# Allegro board ZSTABILIZATOR_FINAL.brd
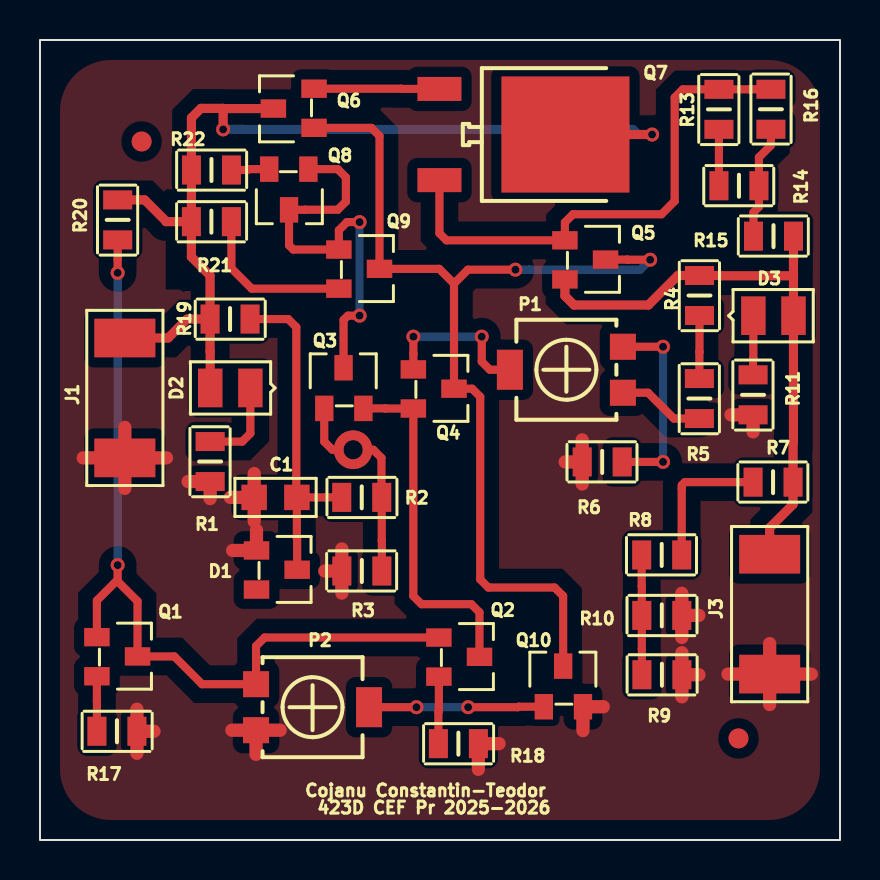
[diagram p0: board, top side]
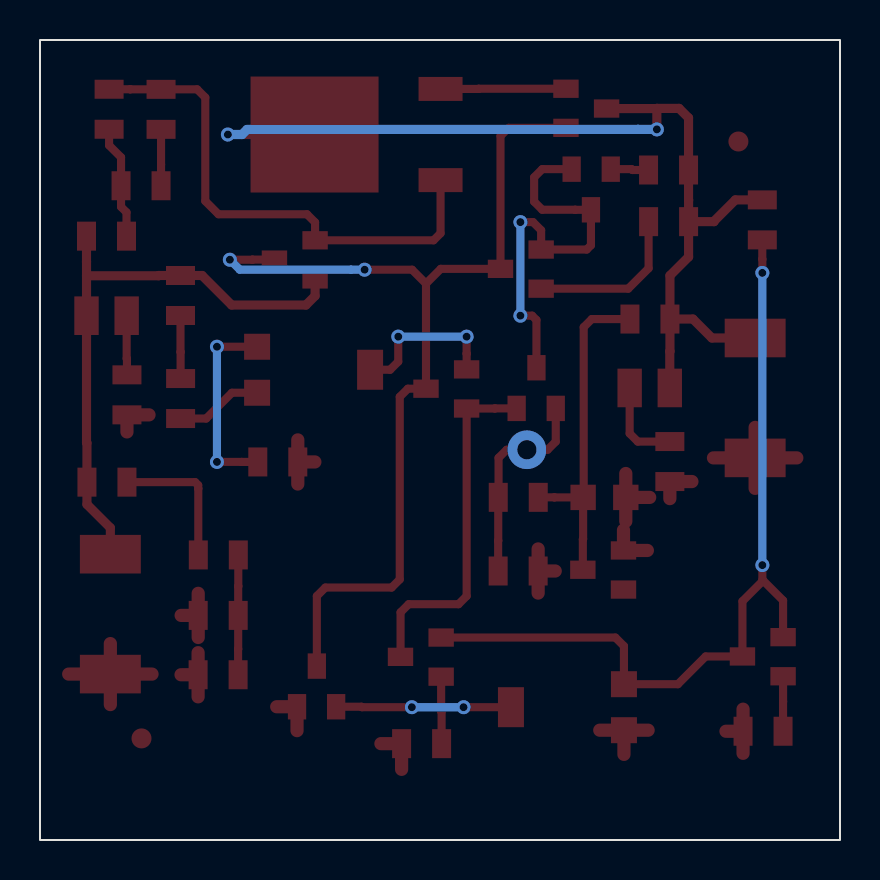
[diagram p1: board, bottom side, seen from below]

Outline 40 x 40 mm; copper layers: TOP, BOTTOM. Coordinates in mm from the lower left corner of the outline.
Outline path: rectangle 0,0 40,40

## Design rules (mm)
nets with their own width: min track width 0.406; nets INM N249921 N249925 N250037 N250043 N250049 N250055 N250075 N250097 N250103 N250201 N250239 N250253 N250273 N250315 N250351 N250357 N250363 N250369 N250387 N252593 N2510651 VREF
nets with their own width: min track width 0.457; nets ALIMENTARE VO
nets with their own width: min track width 0.66; nets GND

## Placement (name value [footprint] x y rotation side)
C1  10n  [SMC0805]  10.71 17.13 0 top
D1  BZX84-C2V7  [TO236]  10.95 14.48 180 top
D2  5V,LED,LED  [SMD0805]  10.52 22.6 180 top
D3  5V,LED,LED  [SMD0805]  35.67 26.21 0 top
J1  CON2  [SMR2512]  4.24 25.1 270 top
J3  CON2  [SMR2512]  36.48 14.29 270 top
NOREF  -  [unnamed]  5.08 34.92 0 top
NOREF#2  -  [#2]  40 0 90 top
NOREF#3  -  [#2]  0 40 0 top
NOREF#4  -  [unnamed]  34.92 5.08 0 top
P1  5k  [TS53YL]  29.14 24.66 0 top
P2  5k  [TS53YL]  10.8 5.49 180 top
Q1  QBC846B  [TO236]  2.97 10.14 180 top
Q2  QBC846B  [TO236]  20.07 10.12 180 top
Q3  QBC846B  [TO236]  14.21 21.71 270 top
Q4  QBC846B  [TO236]  18.8 23.53 180 top
Q5  QBC846B  [TO236]  26.37 29.98 180 top
Q6  QBC846B  [TO236]  13.57 35.61 0 top
Q7  QMJD31C  [TO-252-3]  19.97 37.55 270 top
Q8  QBC856B  [TO236]  13.42 33.41 90 top
Q9  QBC856B  [TO236]  15.07 29.52 180 top
Q10  QBC846B  [TO236]  25.19 6.79 270 top
R1  1k  [RES2012X50N_0805]  8.51 18.92 90 top
R2  3.3k  [RES2012X50N_0805]  16.09 17.13 180 top
R3  3.3k  [RES2012X50N_0805]  16.09 13.45 0 top
R4  5.6k  [RES2012X50N_0805]  32.98 27.23 90 top
R5  680  [RES2012X50N_0805]  32.97 22.07 90 top
R6  3.9k  [RES2012X50N_0805]  28.11 18.9 0 top
R7  100  [RES2012X50N_0805]  36.65 17.89 0 top
R8  100  [RES2012X50N_0805]  31.09 14.25 0 top
R9  100  [RES2012X50N_0805]  31.09 8.26 180 top
R10  100  [RES2012X50N_0805]  31.09 11.23 180 top
R11  220  [RES2012X50N_0805]  35.65 22.26 90 top
R13  1  [RES2012X50N_0805]  33.95 36.53 90 top
R14  1  [RES2012X50N_0805]  34.95 32.71 0 top
R15  1  [RES2012X50N_0805]  36.67 30.19 0 top
R16  1  [RES2012X50N_0805]  36.55 36.54 270 top
R17  220  [RES2012X50N_0805]  3.85 5.44 180 top
R18  220  [RES2012X50N_0805]  20.92 4.82 180 top
R19  1k  [RES2012X50N_0805]  9.5 26.05 180 top
R20  5.6k  [RES2012X50N_0805]  3.88 31 90 top
R21  100  [RES2012X50N_0805]  8.57 30.92 180 top
R22  100  [RES2012X50N_0805]  8.57 33.5 180 top

## Library data of the parts
C1 = C
D1 = BZX84-C2V7_8
D2 D3 = LED_5
J1 = CON2
J3 = CON2_0
P1 P2 = POT
Q1-Q6 Q10 = QBC846B_1
Q7 = QMJD31C_2
Q8 Q9 = QBC856B_2
R1 = R_1
R2-R11 R13-R22 = R_0

## Footprints (pads in the part's own frame, mm; a bottom-side part is the same pattern mirrored in y, then rotated)
RES2012X50N_0805
  rect 0.95x1.45 smd: 1(-1,0) 2(1,0)
SMC0805
  rect 1.27x1.27 smd: 1(0,0) 2(2.134,0)
SMD0805
  rect 1.219x1.93 smd: A(2.007,0) C(0,0)
SMR2512
  rect 1.93x3.048 smd: 1(0,0) 2(5.994,0)
TO236
  rect 1.27x0.914 smd: 1(0.127,0) 2(0.127,1.956) 3(-1.905,0.965)
TO-252-3
  rect 1.2x2.2 smd: 1(0,0) 3(4.56,0)
  rect 5.8x6.4 smd: 2(2.28,6.3)
TS53YL
  rect 1.3x1.3 smd: 1(0,0) 3(0,-2.3)
  rect 1.3x2 smd: 2(-5.65,-1.15)
unnamed
  round 1 smd: (0,0)

## Nets
GND: C1.1 D1.1 J1.2 J3.2 P2.1 Q10.2(E) R1.1 R3.1 R6.1 R9.1 R10.1 R11.1 R17.1 R18.1
ALIMENTARE: D2.A J1.1 Q6.3 Q7.2 R19.2 R20.2 R21.2 R22.2
INM: P1.2(T) Q4.1
VO: D3.A J3.1 Q5.2(E) R4.2 R7.2 R15.2
VREF: Q3.1 R2.1 R3.2
N249921: Q5.1 Q7.3(E) R13.2 R16.1
N249925: R14.2 R15.1 R16.2
N250037: Q6.2(E) Q7.1
N250043: Q8.2(E) R22.1
N250049: Q9.2(E) R21.1
N250055: C1.2 D1.3 R2.2 R19.1
N250075: Q3.3 Q8.1 Q8.3 Q9.1
N250097: Q4.3 Q5.3 Q6.1 Q9.3 Q10.3
N250103: D2.C(2) R1.2
N250201: R7.1 R8.2
N250239: P2.3 Q1.1 Q1.3 Q2.1 R20.1
N250253: Q2.3 Q3.2(E) Q4.2(E)
N250273: R8.1 R9.2 R10.2
N250315: R4.1 R5.2
N250351: P1.3 R5.1
N250357: Q1.2(E) R17.2
N250363: Q2.2(E) R18.2
N250369: P2.2(T) Q10.1
N250387: P1.1 R6.2
N252593: D3.C(2) R11.2
N2510651: R13.1 R14.1

Pads without a net: D1 2

## Via types
v1: diameter 0.7, hole 0.4, TOP to BOTTOM, 14 vias
v2: diameter 1.93, hole 0.965, TOP to BOTTOM, 1 via

## Routing (per net, layer and track width the routed paths; a pad name or vN(x,y) marks a point on that pad's centre or on a via; arc(x,y) is an arc through that point)
GND: length 47.6
  TOP w0.66: R10.1 32.94,11.23 ; R10.1 32.09,10.13 ; R10.1 32.09,12.33 ; J3.2 36.48,9.82 ; J3.2 38.57,8.3 ; J3.2 34.4,8.3 ; J3.2 36.48,6.77 ; R9.1 32.95,8.26 ; R9.1 32.09,7.16 ; R9.1 32.09,9.37 ; R17.1 4.85,6.54 ; R17.1 4.85,4.33 ; R17.1 5.7,5.44 ; 15.09,12.35 R3.1 ; R3.1 15.09,14.55 ; R3.1 14.24,13.45 ; 2.16,19.11 J1.2 ; J1.2 6.33,19.11 ; J1.2 4.24,20.63 ; J1.2 4.24,17.58 ; 26.26,18.9 R6.1 ; R6.1 27.11,17.8 ; R6.1 27.11,20.01 ; 9.52,17.13 C1.1 ; C1.1 10.71,15.94 ; C1.1 10.71,18.32 ; 9.63,14.48 D1.1 10.83,15.49 ; 21.92,3.53 R18.1 22.95,4.82 ; 28.16,6.66 Q10.2 27.15,5.47 ; 9.59,5.49 P2.1 ; P2.1 10.8,4.28 ; P2.1 12.01,5.49 ; 7.4,17.92 R1.1 8.51,17.07 ; 35.65,20.4 R11.1 34.55,21.26
ALIMENTARE: length 53.9
  TOP w0.457: R19.2 8.5,24.43 8.51,24.43 D2.A ; R19.2 7.35,26.05 6.41,25.1 J1.1 ; R19.2 8.5,28.22 7.57,29.15 R21.2 ; 9.16,36.58 v1(9.16,35.53) ; 9.16,36.58 9.16,36.57 Q6.3 ; 9.16,36.58 8.05,36.58 7.57,36.11 R22.2 7.57,32 7.57,32 R21.2 ; R21.2 6.3,30.92 6.3,30.94 5.23,32.01 3.88,32.01 ; Q7.2 v1(30.61,35.27)
  BOTTOM w0.457: v1(9.16,35.53) 10.12,35.53 10.12,35.53 29.65,35.53 29.9,35.27 v1(30.61,35.27)
INM: length 7.9
  TOP w0.406: 23.5,23.51 22.49,23.51 22.09,23.92 v1(22.09,25.17) ; Q4.1 18.67,24.32 18.67,24.32 v1(18.67,25.17)
  BOTTOM w0.406: v1(22.09,25.17) v1(18.67,25.17)
VO: length 29.5
  TOP w0.457: J3.1 36.48,15.61 37.65,16.78 R7.2 37.65,19.85 37.67,19.87 D3.A 37.67,28.21 ; 37.67,28.21 34.07,28.21 34.06,28.23 R4.2 31.89,28.23 30.42,26.75 26.7,26.75 26.25,27.2 Q5.2 ; 37.67,28.21 37.67,28.91 37.67,28.91 R15.2
VREF: length 10.5
  TOP w0.406: R3.2 17.09,14.96 17.09,14.97 R2.1 17.07,17.15 17.07,19.11 16.67,19.51 v2(15.66,19.51) 14.62,19.51 14.21,19.92 Q3.1
N249921: length 26.1
  TOP w0.406: Q7.3 19.97,30.34 20.32,29.98 Q5.1 26.25,30.88 26.65,31.29 31.08,31.29 31.73,31.95 31.73,37.13 32.14,37.53 R13.2 35.48,37.53 35.49,37.54 R16.1
N249925: length 5.7
  TOP w0.406: R15.1 35.67,31.38 35.95,31.66 R14.2 35.95,34.13 36.55,34.73 R16.2
N250037: length 6.3
  TOP w0.406: Q6.2 18.06,37.56 18.07,37.55 Q7.1
N250043: length 1.9
  TOP w0.406: R22.1 10.38,33.5 10.42,33.54 Q8.2
N250049: length 8.1
  TOP w0.406: Q9.2 10.59,27.57 9.57,28.58 R21.1
N250055: length 16.9
  TOP w0.406: C1.2 14.28,17.13 14.28,17.13 R2.2 ; C1.2 12.81,17.16 12.81,25.64 12.41,26.05 R19.1 ; C1.2 12.84,15.05 12.86,15.04 D1.3
N250075: length 20.8
  TOP w0.406: v1(15.98,30.89) 15.35,30.89 14.94,30.49 Q9.1 12.66,29.52 12.45,29.73 Q8.3 13.24,31.51 13.24,31.51 14.89,31.51 15.29,31.92 15.29,33.14 14.89,33.54 Q8.1 ; v1(15.98,26.22) 15.39,26.22 15.18,26 Q3.3
  BOTTOM w0.406: v1(15.98,30.89) v1(15.98,26.22)
N250097: length 50.5
  TOP w0.406: v1(30.51,29.01) 29.38,29.01 29.38,29.02 Q5.3 ; Q10.3 26.16,12.2 25.73,12.62 22.42,12.62 22.01,13.03 22.01,22.16 21.61,22.56 Q4.3 20.7,27.82 ; 20.7,27.82 21.4,28.52 v1(23.77,28.52) ; 20.7,27.82 19.96,28.56 Q9.3 16.98,35.2 16.57,35.61 Q6.1
  BOTTOM w0.406: v1(23.77,28.52) 24.45,28.52 24.45,28.52 30.01,28.52 v1(30.51,29.01)
N250103: length 4.5
  TOP w0.406: D2.C 10.52,20.33 10.11,19.92 8.51,19.92 R1.2
N250201: length 7.1
  TOP w0.406: R7.1 32.24,17.89 32.09,17.74 32.09,17.58 32.09,17.57 R8.2
N250239: length 42.2
  TOP w0.406: 3.84,12.97 4.88,11.94 Q1.3 6.72,9.18 8.11,7.79 P2.3 10.8,9.7 11.23,10.12 Q2.1 ; 3.84,12.97 2.85,11.98 Q1.1 ; 3.84,12.97 3.88,13.01 v1(3.88,13.74) ; R20.1 3.88,29.04 3.88,29.04 v1(3.88,28.36)
  BOTTOM w0.406: v1(3.88,28.36) v1(3.88,13.74)
N250253: length 17.7
  TOP w0.406: Q2.3 21.97,9.16 21.97,11.38 21.57,11.79 19.07,11.79 18.67,12.2 Q4.2 17.26,21.57 17.25,21.58 Q3.2
N250273: length 6
  TOP w0.406: R9.2 30.09,9.55 30.09,9.55 R10.2 30.09,12.69 30.09,12.69 R8.1
N250315: length 3.2
  TOP w0.406: R5.2 32.97,24.4 32.98,24.41 R4.1
N250351: length 4.4
  TOP w0.406: P1.3 30.4,22.36 31.69,21.07 R5.1
N250357: length 2.8
  TOP w0.406: Q1.2 2.85,6.93 2.85,6.92 R17.2
N250363: length 3.4
  TOP w0.406: R18.2 19.92,6.41 19.94,6.44 Q2.2
N250369: length 8.7
  TOP w0.406: Q10.1 23.93,6.66 23.9,6.64 v1(21.41,6.64) ; P2.2 v1(18.82,6.64)
  BOTTOM w0.406: v1(18.82,6.64) v1(21.41,6.64)
N250387: length 9.8
  TOP w0.406: v1(31.15,18.91) 29.92,18.91 29.92,18.9 R6.2 ; P1.1 v1(31.15,24.66)
  BOTTOM w0.406: v1(31.15,24.66) v1(31.15,18.91)
N252593: length 3
  TOP w0.406: R11.2 35.65,24.06 35.67,24.08 D3.C
N2510651: length 2.8
  TOP w0.406: R14.1 33.95,33.77 R13.1

## Copper pours and planes (outline as drawn; the poured copper is in the pictures)
GND on TOP: 1,3.54 1.74,1.74 3.54,1 36.46,1 38.25,1.74 39,3.54 39,36.46 38.25,38.26 36.46,39 3.54,39 1.74,38.26 1,36.46 ; 11 cut-outs

## Text on the board
Ref Des/Silkscreen Top: Cojanu Constantin-Teodor | 423D CEF Pr 2025-2026
XSECTION_CHART: *  SURFACE - AIR 0 MM | L1 TOP CONDUCTOR - COPPER 0.018 MM | *  DIELECTRIC - FR-4 1.564 MM | L2 BOTTOM CONDUCTOR - COPPER 0.018 MM | DESIGN CROSS SECTION CHART | ___________________________ | TOTAL THICKNESS 1.6 MM | 1-2
PLACE_BOUND_TOP: FIGURE | FINISHED_SIZE | 0.4 | DRILL CHART: TOP to BOTTOM | ALL UNITS ARE IN MILLIMETERS | PLATED | QTY | 14
